# Altium PCB GCM_PCB.PcbDoc
Units mm, origin at the board's own origin, x right, y up, seen from the top; angles counter-clockwise.
Board outline 60 x 96 mm, 2 copper layers (Top Layer, Bottom Layer); 91 components, 75 nets, 383 pads, 0 vias.
Unrouted connection lines stored in the file: 239.
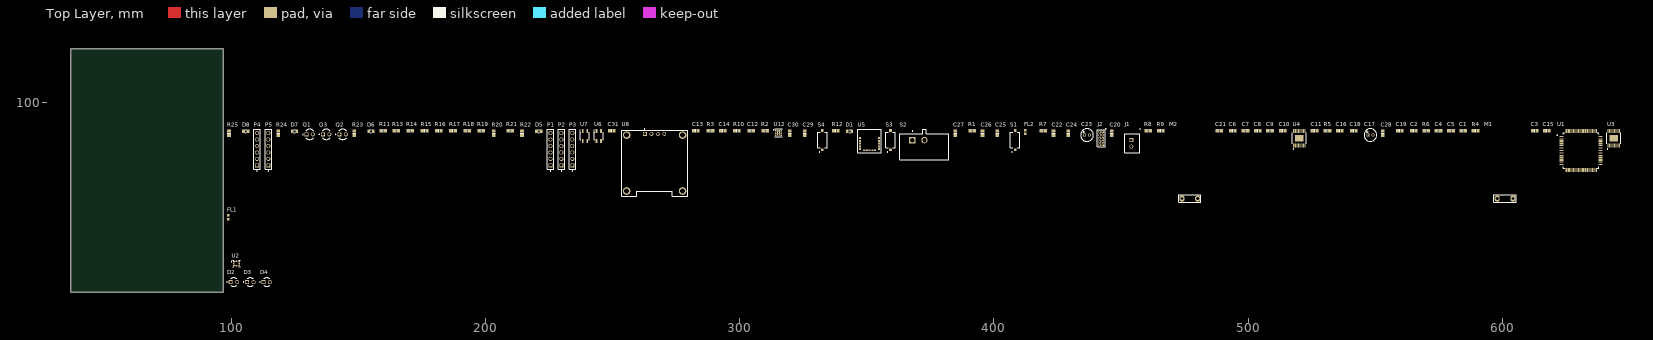
[diagram p0: Top Layer view]
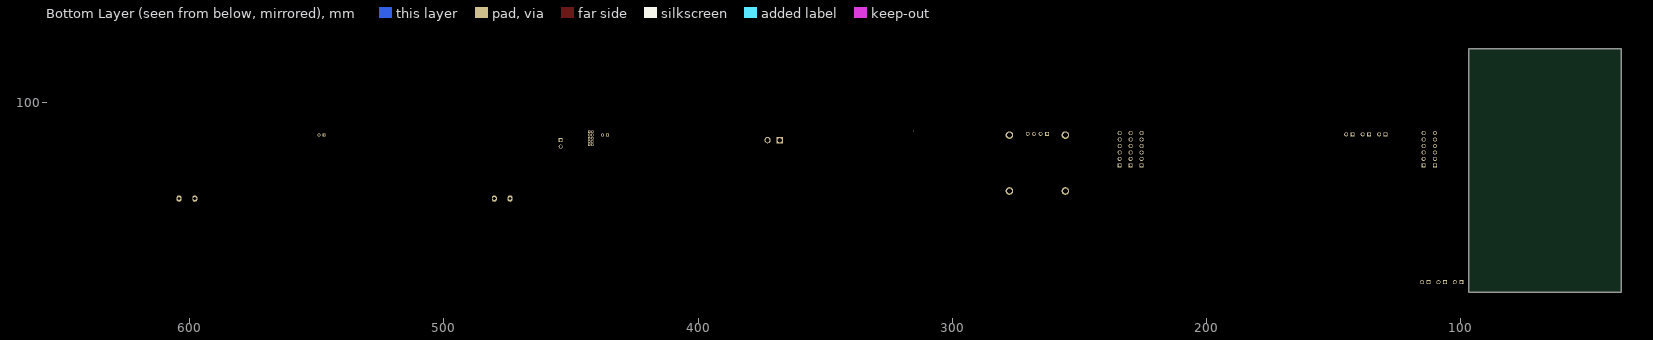
[diagram p1: Bottom Layer view, seen from below]

## Layer stack, top to bottom
Top Solder: solder mask 0.0102, Solder Resist, Dk 3.5
Top Layer: signal copper 0.0356
Dielectric 1: dielectric 0.32, FR-4, Dk 4.8
Bottom Layer: signal copper 0.0356
Bottom Solder: solder mask 0.0102, Solder Resist, Dk 3.5

## Board outline
36.576,25.146 36.576,121.146 96.576,121.146 96.576,25.146

## Design rules (kind name [scope] priority, off if disabled: settings)
Clearance [All] p1: gap=0.15 ignorepadtopadclearanceinfootprint=FALSE
PolygonConnect [All] p1: connectstyle=Relief reliefconductorwidth=0.254 reliefentries=4 polygonreliefangle="90 Angle" airgapwidth=0.254
RoutingVias [All] p1: holewidth=0.711 width=1.27 viastyle="Through Hole" minholewidth=0.711 minwidth=1.27 maxholewidth=0.711 maxwidth=1.27
SolderMaskExpansion [All] p1: expansion=0.102 istentingtop=FALSE
Width [All] p1: maxlimit=0.254 minlimit=0.254 preferedwidth=0.254
30 further rules are at their usual default settings.

## Components (designator, comment, footprint, x,y, rotation, side; value= is the part's Value field where it differs from the comment)
C1 "100nF" "CAPACITOR TANTALIO" 584.708,88.773 r0 top
C2 "1uF" "CAPACITOR TANTALIO" 565.277,88.773 r0 top
C3 "100nF" "CAPACITOR TANTALIO" 612.775,88.773 r0 top
C4 "2.2uF" "CAPACITOR TANTALIO" 574.929,88.773 r0 top
C5 "2.2uF" "CAPACITOR TANTALIO" 579.882,88.773 r0 top
C6 "100nF" "CAPACITOR TANTALIO" 494.03,88.773 r0 top
C7 "100nF" "CAPACITOR TANTALIO" 498.983,88.773 r0 top
C8 "100nF" "CAPACITOR TANTALIO" 503.809,88.773 r0 top
C9 "100nF" "CAPACITOR TANTALIO" 508.635,88.773 r0 top
C10 "100nF" "CAPACITOR TANTALIO" 513.588,88.773 r0 top
C11 "4.7uF" "CAPACITOR TANTALIO" 526.161,88.773 r0 top
C12 "3.3uF" "CAPACITOR TANTALIO" 304.419,88.773 r0 top
C13 "10uF" "CAPACITOR TANTALIO" 282.702,88.773 r0 top
C14 "22uF" "CAPACITOR TANTALIO" 293.243,88.773 r0 top
C15 "22nF" "CAPACITOR TANTALIO" 617.601,88.773 r0 top
C16 "100nF" "CAPACITOR TANTALIO" 536.067,88.773 r0 top
C17 "10 uF" "Cap El 10uF" 485.648,149.606 r0 top
C18 "100nF" "CAPACITOR TANTALIO" 541.655,88.773 r0 top
C19 "100nF" "CAPACITOR TANTALIO" 559.689,88.773 r0 top
C20 "100nF" "CAPACITOR TANTALIO" 446.405,87.884 r90 top
C21 "22nF" "CAPACITOR TANTALIO" 488.696,88.773 r0 top
C22 "100nF" "CAPACITOR TANTALIO" 423.418,87.884 r90 top
C23 "10 uF" "Cap El 10uF" 374.142,149.606 r0 top
C24 "100nF" "CAPACITOR TANTALIO" 429.26,87.884 r90 top
C25 "100nF" "CAPACITOR TANTALIO" 401.32,87.884 r90 top
C26 "2.2uF" "CAPACITOR TANTALIO" 395.478,87.884 r90 top
C27 "10nF" "CAPACITOR TANTALIO" 384.81,87.884 r90 top
C28 "100nF" "CAPACITOR TANTALIO" 552.958,87.884 r90 top
C29 "100nF" "CAPACITOR TANTALIO" 325.501,87.884 r90 top
C30 "10uF" "CAPACITOR TANTALIO" 319.659,87.884 r90 top
C31 "100nF" "CAPACITOR TANTALIO" 249.555,88.773 r0 top
D1 "BLUE" "LED SMD" 343.154,88.646 r0 top
D2 "TSAL4400" LEDRD254W45D335H610 100.838,29.21 r0 top
D3 "TSAL4400" LEDRD254W45D335H610 107.315,29.21 r0 top
D4 "TSAL4400" LEDRD254W45D335H610 113.792,29.21 r0 top
D5 "GREEN" "LED SMD" 220.853,88.646 r0 top
D6 "YELLOW" "LED SMD" 154.813,88.646 r0 top
D7 "RED" "LED SMD" 124.714,88.646 r0 top
D8 "WHITE" "LED SMD" 105.537,88.646 r0 top
FL1 "BLM18AG601SN1D" BEADC1608X95N 98.679,54.737 r90 top
FL2 "BLM18AG601SN1D" BEADC1608X95N 412.369,88.265 r90 top
J1 "Bateria" JST_B2B-XH-A 453.517,83.82 r90 top
J2 "SWD/USART" AMPHENOL_20021311-00026T4LF 442.214,80.772 r90 top
M1 "Faulhaber" MOTOR 601.091,63.627 r0 top
M2 "Faulhaber" MOTOR 477.012,63.627 r0 top
P1 "ToF" FHDR1X6 225.425,81.534 r90 top
P2 "ToF" FHDR1X6 229.743,81.534 r90 top
P3 "ToF" FHDR1X6 234.061,81.534 r90 top
P4 "ToF" FHDR1X6 109.982,81.534 r90 top
P5 "ToF" FHDR1X6 114.427,81.534 r90 top
Q1 "TEFT4300" XDCR_TEFT4300 130.683,87.376 r0 top
Q2 "TEFT4300" XDCR_TEFT4300 143.637,87.376 r0 top
Q3 "TEFT4300" XDCR_TEFT4300 137.16,87.376 r0 top
R1 "47kΩ" "RESISTENCIA SMD" 391.414,88.773 r0 top value=3KΩ
R2 "14.7kΩ" "RESISTENCIA SMD" 310.007,88.773 r0 top value=3KΩ
R3 "4.7kΩ" "RESISTENCIA SMD" 288.417,88.773 r0 top value=3KΩ
R4 "5.5kΩ" "RESISTENCIA SMD" 589.534,88.773 r0 top value=3KΩ
R5 "10kΩ" "RESISTENCIA SMD" 531.241,88.773 r0 top value=3KΩ
R6 "100Ω" "RESISTENCIA SMD" 570.103,88.773 r0 top value=3KΩ
R7 "10kΩ" "RESISTENCIA SMD" 419.354,88.773 r0 top value=3KΩ
R8 "100Ω" "RESISTENCIA SMD" 460.756,88.773 r0 top value=3KΩ
R9 "5.5kΩ" "RESISTENCIA SMD" 465.582,88.773 r0 top value=3KΩ
R10 "100kΩ" "RESISTENCIA SMD" 298.831,88.773 r0 top value=3KΩ
R11 "100Ω" "RESISTENCIA SMD" 159.639,88.773 r0 top value=3KΩ
R12 "150Ω" "RESISTENCIA SMD" 337.693,88.773 r0 top value=3KΩ
R13 "3.3kΩ" "RESISTENCIA SMD" 164.719,88.773 r0 top value=3KΩ
R14 "100Ω" "RESISTENCIA SMD" 170.307,88.773 r0 top value=3KΩ
R15 "3.3kΩ" "RESISTENCIA SMD" 175.895,88.773 r0 top value=3KΩ
R16 "100Ω" "RESISTENCIA SMD" 181.483,88.773 r0 top value=3KΩ
R17 "3.3kΩ" "RESISTENCIA SMD" 187.071,88.773 r0 top value=3KΩ
R18 "100Ω" "RESISTENCIA SMD" 192.659,88.773 r0 top value=3KΩ
R19 "3.3kΩ" "RESISTENCIA SMD" 198.247,88.773 r0 top value=3KΩ
R20 "100Ω" "RESISTENCIA SMD" 203.073,87.884 r90 top value=3KΩ
R21 "3.3kΩ" "RESISTENCIA SMD" 209.677,88.773 r0 top value=3KΩ
R22 "680Ω" "RESISTENCIA SMD" 214.249,87.884 r90 top value=3KΩ
R23 "680Ω" "RESISTENCIA SMD" 148.209,87.884 r90 top value=3KΩ
R24 "680Ω" "RESISTENCIA SMD" 118.237,87.884 r90 top value=3KΩ
R25 "150Ω" "RESISTENCIA SMD" 98.933,87.884 r90 top value=3KΩ
S1 "BOOT" SW_TS09-63-25-WT-160-SMT-TR 408.305,85.09 r90 top
S2 "ON/OFF" SW_L101011ML04Q 372.618,82.55 r0 top
S3 "RESET" SW_TS09-63-25-WT-160-SMT-TR 359.283,85.09 r90 top
S4 "USER SWITCH" SW_TS09-63-25-WT-160-SMT-TR 332.486,85.09 r90 top
U1 "STM32H743VIT6" QFP50P1600X1600X160-100N 631.063,81.026 r0 top
U2 "ICM-42688-P" PQFN50P300X250X97-14N 101.876,36.572 r0 top
U3 "DRV8874PWPR" SOP65P640X120-17N 643.89,85.852 r90 top
U4 "DRV8874PWPR" SOP65P640X120-17N 520.192,85.852 r90 top
U5 "E104-BT5005A" MOD15_E104-BT5005A_BYT 351.028,84.836 r0 top
U6 "QRE1113GR" SOIC180P460X187-4N 244.475,86.741 r0 top
U7 "QRE1113GR" SOIC180P460X187-4N 239.014,86.741 r0 top
U8 "DM-OLED096-636" MODULE_DM-OLED096-636 266.446,76.073 r0 top
U12 "TPS82130SILT" CONV_TPS82140SILR 315.214,88.011 r0 top

## Footprints (in the part's own frame and the unit in brackets; to place one, negate y for a bottom-side part, rotate by r counter-clockwise, add the part's x,y. Pads: shape width x height; smd on the part's side, far side on the other; paste and mask are expansions set on the pad)
AMPHENOL_20021311-00026T4LF [mm]
  rect 1.1x1.1 / inner round 1.1 / far side rect 1.1x1.1 hole 0.7: 1(7.62,-0.635)
  round 1.1 hole 0.7: 2(7.62,0.635) 3(6.35,-0.635) 4(6.35,0.635) 5(5.08,-0.635) 6(5.08,0.635) 7(3.81,-0.635) 8(3.81,0.635) 9(2.54,-0.635) 10(2.54,0.635)
  silkscreen extent 1.65,-1.88 8.86,1.5
BEADC1608X95N [mm]
  rect 1x0.97 smd: 1(-0.735,0) 2(0.735,0)
  body extent -0.8,-0.4 0.8,0.4, height 0.95
"Cap El 10uF" [mm]
  rect 1.25x1.25 hole 0.7: 1(61.5,-62.5)
  round 1.25 hole 0.7: 2(63.5,-62.5)
  silkscreen extent 60,-65 65,-60, body extent 60.01,-64.98 65.01,-59.99, height 1.27
"CAPACITOR TANTALIO" [mm]
  rect 1.2x1.4 smd: 1(-0.9,0) 2(0.9,0)
  silkscreen extent 0,-0.6 0,0.6, body extent -1.59,-0.79 1.61,0.81, height 1.8
CONV_TPS82140SILR [mm]
  rrect5% 0.6x0.5 smd paste-1 mask+0: 1(-1.05,0.975) 2(-1.05,0.325) 3(-1.05,-0.325) 4(-1.05,-0.975) 5(1.05,-0.975) 6(1.05,-0.325) 7(1.05,0.325) 8(1.05,0.975)
  rrect5% 1.2x2 smd paste-2 mask+0: 9(0,0)
  round 0.3 hole 0.2 mask+0: 10(0,0.75) 11(0,0) 12(0,-0.75)
  silkscreen extent -2,-1.55 1.4,1.55, body extent -1.5,-1.4 1.5,1.4, height 1.53
FHDR1X6 [mm]
  rect 1.605x1.605 / inner round 1.605 / far side rect 1.605x1.605 hole 1.07: 1(-6.35,0)
  round 1.605 hole 1.07: 2(-3.81,0) 3(-1.27,0) 4(1.27,0) 5(3.81,0) 6(6.35,0)
  silkscreen extent -8.6,-1.27 7.87,1.27, body extent -7.87,-1.27 7.87,1.27, height 8.51
JST_B2B-XH-A [mm]
  rect 1.575x1.575 / inner round 1.575 / far side rect 1.575x1.575 hole 1.05: 1(1.25,-0.525)
  round 1.575 hole 1.05: 2(-1.25,-0.525)
  silkscreen extent -3.7,-4.04 5.81,1.99, body extent -3.68,-4.06 3.72,1.69, height 7
"LED SMD" [mm] "0805"
  rect 1.1x1.45 smd: A(0.9,0) C(-0.9,0)
  silkscreen extent -0.2,-0.6 0.2,0.6, body extent -0.95,-0.65 1.05,0.6, height 0.7
LEDRD254W45D335H610 [mm]
  round 1.56 hole 1.04: A(1.27,0)
  rect 1.56x1.56 hole 1.04: C(-1.27,0)
  silkscreen extent -2.8,-1.68 1.12,1.68
MOD15_E104-BT5005A_BYT [mil]
  rect 28x32 smd paste+0 mask+0: 1(-145.67,43.31) 2(-145.67,0) 3(-145.67,-43.31) 4(-145.67,-86.61) 5(-145.67,-129.92) 11(145.67,-129.92) 12(145.67,-86.61) 13(145.67,-43.31) 14(145.67,0) 15(145.67,43.31)
  rect 32x28 smd paste+0 mask+0: 6(-86.61,-145.67) 7(-43.31,-145.67) 8(0,-145.67) 9(43.31,-145.67) 10(86.61,-145.67)
  silkscreen extent -182,-182 182,182
MODULE_DM-OLED096-636 [mm]
  rect 1.508x1.508 / inner round 1.508 / far side rect 1.508x1.508 hole 1: 1(-3.81,11.5)
  round 1.508 hole 1: 2(-1.27,11.5) 3(1.27,11.5) 4(3.81,11.5)
  round 3 hole 2: S1(-11,11) S2(11,11) S3(11,-11) S4(-11,-11)
  silkscreen extent -13,-13 13,13.6, body extent -13,-13 13,13, height 5.66
MOTOR [mm]
  oval 2x2.5 hole 1.3: 1(-3.048,-1.524) 2(3.152,-1.524)
  silkscreen extent -4.35,-3.03 4.43,-0.03, body extent -8.36,-3.17 8.61,26.12, height 8.5
PQFN50P300X250X97-14N [mm]
  rrect50% 0.59x0.35 smd mask+0: 1(-1.165,0.75) 2(-1.165,0.25) 3(-1.165,-0.25) 4(-1.165,-0.75) 8(1.165,-0.75) 9(1.165,-0.25) 10(1.165,0.25) 11(1.165,0.75)
  rrect50% 0.35x0.59 smd mask+0: 5(-0.5,-0.915) 6(0,-0.915) 7(0.5,-0.915) 12(0.5,0.915) 13(0,0.915) 14(-0.5,0.915)
  silkscreen extent -2.1,-1.25 1.5,1.25
QFP50P1600X1600X160-100N [mm]
  rrect25% 1.56x0.28 smd: 1(-7.68,6) 2(-7.68,5.5) 3(-7.68,5) 4(-7.68,4.5) 5(-7.68,4) 6(-7.68,3.5) 7(-7.68,3) 8(-7.68,2.5) 9(-7.68,2) 10(-7.68,1.5) 11(-7.68,1) 12(-7.68,0.5) 13(-7.68,0) 14(-7.68,-0.5) 15(-7.68,-1) 16(-7.68,-1.5) 17(-7.68,-2) 18(-7.68,-2.5) 19(-7.68,-3) 20(-7.68,-3.5) 21(-7.68,-4) 22(-7.68,-4.5) 23(-7.68,-5) 24(-7.68,-5.5) 25(-7.68,-6) 51(7.68,-6) 52(7.68,-5.5) 53(7.68,-5) 54(7.68,-4.5) 55(7.68,-4) 56(7.68,-3.5) 57(7.68,-3) 58(7.68,-2.5) 59(7.68,-2) 60(7.68,-1.5) 61(7.68,-1) 62(7.68,-0.5) 63(7.68,0) 64(7.68,0.5) 65(7.68,1) 66(7.68,1.5) 67(7.68,2) 68(7.68,2.5) 69(7.68,3) 70(7.68,3.5) 71(7.68,4) 72(7.68,4.5) 73(7.68,5) 74(7.68,5.5) 75(7.68,6)
  rrect25% 0.28x1.56 smd: 26(-6,-7.68) 27(-5.5,-7.68) 28(-5,-7.68) 29(-4.5,-7.68) 30(-4,-7.68) 31(-3.5,-7.68) 32(-3,-7.68) 33(-2.5,-7.68) 34(-2,-7.68) 35(-1.5,-7.68) 36(-1,-7.68) 37(-0.5,-7.68) 38(0,-7.68) 39(0.5,-7.68) 40(1,-7.68) 41(1.5,-7.68) 42(2,-7.68) 43(2.5,-7.68) 44(3,-7.68) 45(3.5,-7.68) 46(4,-7.68) 47(4.5,-7.68) 48(5,-7.68) 49(5.5,-7.68) 50(6,-7.68) 76(6,7.68) 77(5.5,7.68) 78(5,7.68) 79(4.5,7.68) 80(4,7.68) 81(3.5,7.68) 82(3,7.68) 83(2.5,7.68) 84(2,7.68) 85(1.5,7.68) 86(1,7.68) 87(0.5,7.68) 88(0,7.68) 89(-0.5,7.68) 90(-1,7.68) 91(-1.5,7.68) 92(-2,7.68) 93(-2.5,7.68) 94(-3,7.68) 95(-3.5,7.68) 96(-4,7.68) 97(-4.5,7.68) 98(-5,7.68) 99(-5.5,7.68) 100(-6,7.68)
  silkscreen extent -9.54,-7 7,7, body extent -8,-8 8,8, height 1.6
"RESISTENCIA SMD" [mm] "0805"
  rect 1.2x1.4 smd: 1(-0.9,0) 2(0.9,0)
  silkscreen extent 0,-0.6 0,0.6, body extent -1,-0.61 1,0.64, height 0.6
SOIC180P460X187-4N [mm]
  rect 0.69x1.57 smd: 1(-0.9,1.975) 2(-0.9,-1.975) 3(0.9,-1.975) 4(0.9,1.975)
  silkscreen extent -2,-1.45 1.8,2.3, body extent -1.7,-2.3 1.7,2.3, height 1.87
SOP65P640X120-17N [mm]
  rrect25% 1.57x0.41 smd: 1(-2.87,2.275) 2(-2.87,1.625) 3(-2.87,0.975) 4(-2.87,0.325) 5(-2.87,-0.325) 6(-2.87,-0.975) 7(-2.87,-1.625) 8(-2.87,-2.275) 9(2.87,-2.275) 10(2.87,-1.625) 11(2.87,-0.975) 12(2.87,-0.325) 13(2.87,0.325) 14(2.87,0.975) 15(2.87,1.625) 16(2.87,2.275)
  rect 2.48x3.4 smd paste-3: 17(0,0)
  silkscreen extent -4.3,-2.8 2.2,2.8, body extent -3.2,-2.5 3.2,2.5, height 1.2
SW_L101011ML04Q [mm]
  rect 2.475x2.475 / inner round 2.475 / far side rect 2.475x2.475 hole 1.65: 1(-4.75,2.54)
  round 2.475 hole 1.65: 2(0,2.54)
  silkscreen extent -9.65,-5.08 9.65,6.86, body extent -9.65,-10.29 9.65,6.73, height 10.46
SW_TS09-63-25-WT-160-SMT-TR [mm]
  rect 1.1x1 smd: 1(-3.75,0) 2(3.75,0)
  silkscreen extent -4.82,-1.85 3.05,1.85, body extent -4.05,-1.85 4.05,1.85, height 2.5
XDCR_TEFT4300 [mm]
  round 1.56 hole 1.04: C(1.27,0)
  rect 1.56x1.56 / inner round 1.56 / far side rect 1.56x1.56 hole 1.04: E(-1.27,0)
  silkscreen extent -2.8,-2.03 1.55,2.03, body extent -1.6,-1.95 1.6,1.95, height 6.1

## Part data
C1 C2 C3 C4 C5 C6 C7 C8 C9 C10 C11 C12 C13 C14 C15 C16 C18 C19 C20 C21 C22 C24 C25 C26 C27 C28 C29 C30 C31: library part "CAPACITOR TANTALIO", "0805", Package="0603 Murata", Digi-Key_Part_Number=490-13230-1-ND, DigiKey-Purchase-URL=https://snapeda.com/shop?store=DigiKey&id=1181520, MF=Murata, Mouser-Purchase-URL=https://snapeda.com/shop?store=Mouser&id=1181520, MP=GRM035R60J475ME15D, SnapEDA_Link=https://www.snapeda.com/parts/GRM035R60J475ME15D/Murata%20Electronics%20North%20America/view-part/1181520/?ref=snap
C17 C23: library part "Cap el 10 uF"
D1 D5 D6 D7 D8: library part "LED SMD", "0805", Package=None, Availability=Unavailable, MP=597-5311-402F, Price=None
D2 D3 D4: "Infrared Emitter 940nm 36mW/sr Circular Top Mount 2-Pin T-1 Bulk", Package="Radial Vishay", Availability=Unavailable, MF="Vishay Semiconductor", MP=TSAL4400, Price=None, SnapEDA_Link=https://www.snapeda.com/parts/TSAL4400/Vishay%20Semiconductor%20Opto%20Division/view-part/3623381/?ref=snap
FL1 FL2: "600 Ohms @ 100 MHz 1 - Ferrite Bead 0603 (1608 Metric) 500mA 380mOhm", Package="1608 Murata", Availability="In Stock", Check_prices=https://www.snapeda.com/parts/BLM18AG601SN1D/Murata/view-part/?ref=eda, MF=Murata, MP=BLM18AG601SN1D, Price=None, Purchase-URL=https://pricing.snapeda.com/search/part/BLM18AG601SN1D/?ref=eda, SnapEDA_Link=https://www.snapeda.com/parts/BLM18AG601SN1D/Murata/view-part/?ref=snap
J1: library part B2B-XH-A, Package=None, Availability=Unavailable, MF="{'manufacturer': u'JST Sales America Inc.'}", MP=B2B-XH-A, Price=None
J2: library part 20021311-00026T4LF, Package=None, Availability=Unavailable, MF="Amphenol ICC", MP=20021311-00026T4LF, Price=None
P1 P2 P3 P4 P5: library part "FHeader 6X1", LatestRevisionDate=17-Jul-2002, LatestRevisionNote="Re-released for DXP Platform.", Publisher="Altium Limited"
Q1 Q2 Q3: "Phototransistors 925nm Top View Radial, 3mm Dia (T-1)", Package=None, Check_prices=https://www.snapeda.com/parts/TEFT4300/Vishay/view-part/?ref=eda, MF="Vishay Semiconductor", MP=TEFT4300, SnapEDA_Link=https://www.snapeda.com/parts/TEFT4300/Vishay/view-part/?ref=snap
R1 R2 R3 R4 R5 R6 R7 R8 R9 R10 R11 R12 R13 R14 R15 R16 R17 R18 R19 R20 R21 R22 R23 R24 R25: library part RESISTENCIA, "0805", LatestRevisionDate=17-Jul-2002, LatestRevisionNote="Re-released for DXP Platform.", PackageDescription="Axial Device, Thru-Hole; 2 Leads; 0.3 in Pin Spacing", PackageReference=AXIAL-0.3, Published=8-Jun-2000, Publisher="Altium Limited"
S1 S3 S4: library part TS09-63-25-WT-160-SMT-TR, "6.1 x 3.7 mm, 2.5 mm Actuator Height, 160 gf, White, Surface Mount, SPST, Tactile Switch", Package=None, Check_prices=https://www.snapeda.com/parts/TS09-63-25-WT-160-SMT-TR/Same+Sky/view-part/?ref=eda, MF="Same Sky", MP=TS09-63-25-WT-160-SMT-TR, SnapEDA_Link=https://www.snapeda.com/parts/TS09-63-25-WT-160-SMT-TR/Same+Sky/view-part/?ref=snap
S2: library part L101011ML04Q, "Switch Slide ON OFF SPST Side Slide 4A 250VAC 125VDC PC Pins Thru-Hole Bulk", Package=None, Check_prices=https://www.snapeda.com/parts/L101011ML04Q/C%2526K/view-part/?ref=eda, MF=C&K, MP=L101011ML04Q, SnapEDA_Link=https://www.snapeda.com/parts/L101011ML04Q/C%2526K/view-part/?ref=snap
U1: "ARMÂ® CortexÂ®-M7 STM32H7 Microcontroller IC 32-Bit Single-Core 480MHz 2MB (2M x 8) FLASH 100-LQFP (14x14)", Package="LQFP-100 STMicroelectronics", Check_prices=https://www.snapeda.com/parts/STM32H743VIT6/STMicroelectronics/view-part/?ref=eda, MF=STMicroelectronics, MP=STM32H743VIT6, SnapEDA_Link=https://www.snapeda.com/parts/STM32H743VIT6/STMicroelectronics/view-part/?ref=snap
U2: "Accelerometer, Gyroscope, 6 Axis Sensor Output", Package=None, Availability=Unavailable, MP=ICM-42688-P, Price=None
U3 U4: "40-V, 6-A H-bridge motor driver with integrated current sensing feedback", Package="HTSSOP-16 Texas Instruments", Check_prices=https://www.snapeda.com/parts/DRV8874PWPR/Texas+Instruments/view-part/?ref=eda, MF="Texas Instruments", MP=DRV8874PWPR, SnapEDA_Link=https://www.snapeda.com/parts/DRV8874PWPR/Texas+Instruments/view-part/?ref=snap
U5: "No Description Available", Manufacturer_Name="Chengdu Ebyte Elec Tech", Copyright="Copyright (C) 2026 Ultra Librarian. All rights reserved.", Manufacturer_Part_Number=E104-BT5005A, RefDes=RefDes, Type=RF
U6 U7: "Reflective Optical Sensor 0.039 (1mm) 4-SMD, Gull Wing", Package="ARUSM-313-4 ON Semiconductor", Availability="In Stock", Check_prices=https://www.snapeda.com/parts/QRE1113GR/Onsemi/view-part/?ref=eda, MF="ON Semiconductor", MP=QRE1113GR, Price=None, Purchase-URL=https://pricing.snapeda.com/search/part/QRE1113GR/?ref=eda, SnapEDA_Link=https://www.snapeda.com/parts/QRE1113GR/Onsemi/view-part/?ref=snap
U8: "0.96â€ 128 X 64 MONOCHROME GRAPHIC OLED DISPLAY MODULE - I2C", Package=Package, Check_prices=https://www.snapeda.com/parts/DM-OLED096-636/Display+Module/view-part/?ref=eda, MF="Display Module", MP=DM-OLED096-636, SnapEDA_Link=https://www.snapeda.com/parts/DM-OLED096-636/Display+Module/view-part/?ref=snap
U12: "Non-Isolated PoL Module DC DC Converter 1 Output 0.9 ~ 5V - - - 3A 3V - 17V Input", Package=None, Check_prices=https://www.snapeda.com/parts/TPS82130SIL/Texas+Instruments/view-part/?ref=eda, MF="Texas Instruments", MP=TPS82130SIL, SnapEDA_Link=https://www.snapeda.com/parts/TPS82130SIL/Texas+Instruments/view-part/?ref=snap
M1 M2: LatestRevisionDate=17-Jul-2002, LatestRevisionNote="Re-released for DXP Platform.", Publisher="Altium Limited"

## Nets (pads, with @x,y where several pads share a name; then routed paths per layer and width w, separated by ;. In a path a pad name is that pad's centre, name@x,y a point inside that pad or via, vN(x,y) a via of type N, cw(c..) or ccw(c..) an arc to the next point about the centre after c; other vN are vias at no path point)
BAT: J1.1 S2.2
BOOT0: R1.2 S1.1 U1.94
CS: U1.92 U2.12
"DAC M1": R6.2 U1.28
"DAC M2": R8.2 U1.29
DATA: U1.65 U5.15
"DIR M1": U1.40 U3.2
"DIR M2": U1.42 U4.2
DISC: U1.66 U5.6
FB: R2.1 R3.2 U12.6
GND: C1.2 C2.2 C3.1 C4.1 C5.1 C6.1 C7.1 C8.1 C9.1 C10.1 C11.2 C12.1 C13.1 C14.1 C16.1 C17.2 C19.1 C20.1 C22.1 C23.2 C25.1 C26.1 C27.1 C28.2 C29.1 C30.1 C31.1 D2.C D3.C D4.C D5.C D6.C D7.C D8.C J1.2 J2.6 J2.8 J2.10 P1.2 P2.2 P3.2 P4.2 P5.2 Q1.E Q2.E Q3.E R1.1 R3.1 R4.1 R9.1 S3.1 S4.1 U1.10 U1.19 U1.26 U1.49 U1.74 U1.99 U2.2 U2.3 U2.6 U2.7 U2.9 U2.10 U2.11 U3.7 U3.9 U3.15 U3.16 U4.7 U4.9 U4.15 U4.16 U5.5 U5.14 U6.2 U6.4 U7.2 U7.4 U8.1 U12.3 U12.9 U12.10 U12.11 U12.12
"INT1 IMU": U1.87 U2.4
"IPROPI M1": R4.2 U1.15 U3.6
"IPROPI M2": R9.2 U1.16 U4.6
"IR1 FLOOR": R13.2 U1.32 U7.3
"IR2 FLOOR": R15.2 U1.33 U6.3
"IR 1": Q1.C R17.1 U1.22
"IR 2": Q3.C R19.1 U1.23
"IR 3": Q2.C R21.1 U1.24
"LED 1": R23.2 U1.59
"LED 2": R24.2 U1.60
"LED 3": R25.2 U1.61
"MODE BT": U1.64 U5.9
NetC1_1: C1.1 C2.1 FL1.1 U1.20 U1.21
NetC12_2: C12.2 U12.8
NetC15_1: C15.1 U3.14
NetC15_2: C15.2 U3.13
NetC21_1: C21.1 U4.14
NetC21_2: C21.2 U4.13
NetC25_2: C25.2 C26.2 FL2.1 U2.8
NetD1_C: D1.C U5.13
NetD2_A: D2.A R16.1
NetD3_A: D3.A R18.1
NetD4_A: D4.A R20.1
NetM1_1: M1.1 U3.8
NetM1_2: M1.2 U3.10
NetM2_1: M2.1 U4.8
NetM2_2: M2.2 U4.10
NetR11_2: R11.2 U7.1
NetR14_2: R14.2 U6.1
"NFAULT M1": R5.2 U1.81 U3.4
"NFAULT M2": R7.2 U1.82 U4.4
NRST: C28.1 J2.4 S3.2 U1.14
NSLEEP: U1.43 U3.3 U4.3
"ON/OFF IR": R16.2 R18.2 R20.2 U1.83
"PWM M1": U1.39 U3.1
"PWM M2": U1.41 U4.1
"RST BT": C31.2 R10.2 U1.2 U5.3
RX: J2.9 U1.69
"RX BT": U1.55 U5.11
SCL: P1.3 P2.3 P3.3 P4.3 P5.3 U1.95 U8.3
SCLK: U1.52 U2.13
SDA: P1.4 P2.4 P3.4 P4.4 P5.4 U1.93 U8.4
SDI: U1.54 U2.14
SDO: U1.53 U2.1
SWCLK: J2.5 U1.76
SWDIO: J2.3 U1.72
SWITCH: S4.2 U1.58
SWO: J2.2 U1.89
TX: J2.7 U1.68
"TX BT": U1.56 U5.12
VCAP1: C4.2 U1.48
VCAP2: C5.2 U1.73
"VCC BT": C3.2 C6.2 C7.2 C8.2 C9.2 C10.2 C11.1 C14.2 C27.2 C29.2 C30.2 FL1.2 FL2.2 J2.1 P1.1 P2.1 P3.1 P4.1 P5.1 R2.2 R5.1 R7.1 R10.1 R11.1 R12.2 R13.1 R14.1 R15.1 R17.2 R19.2 R21.2 R22.2 S1.2 U1.6 U1.11 U1.27 U1.50 U1.75 U1.100 U2.5 U5.4 U8.2 U12.4
"VCP M1": C18.2 U3.12
"VCP M2": C24.2 U4.12
VM: C13.2 C16.2 C17.1 C22.2 C23.1 S2.1 U3.11 U4.11 U12.1 U12.2
"VREF M1": C19.2 R6.1 U3.5
"VREF M2": C20.2 R8.1 U4.5
W/S: U1.63 U5.7
XSHUT1: P1.6 U1.97
XSHUT2: P2.6 U1.98
XSHUT3: P3.6 U1.1
XSHUT4: P4.6 U1.3
XSHUT5: P5.6 U1.4
pads on no net: C18.1 C24.1 D1.A D5.A D6.A D7.A D8.A P1.5 P2.5 P3.5 P4.5 P5.5 R12.1 R22.1 R23.1 R24.1 R25.1 U1.5 U1.7 U1.8 U1.9 U1.12 U1.13 U1.17 U1.18 U1.25 U1.30 U1.31 U1.34 U1.35 U1.36 U1.37 U1.38 U1.44 U1.45 U1.46 U1.47 U1.51 U1.57 U1.62 U1.67 U1.70 U1.71 U1.77 U1.78 U1.79 U1.80 U1.84 U1.85 U1.86 U1.88 U1.90 U1.91 U1.96 U3.17 U4.17 U5.1 U5.2 U5.8 U5.10 U8.S1 U8.S2 U8.S3 U8.S4 U12.5 U12.7